# Altium PCB Item.PcbDoc
Units mm, origin at the board's own origin, x right, y up, seen from the top; angles counter-clockwise.
Board outline 55.9 x 55.9 mm, 2 copper layers (Top Layer, Bottom Layer); 35 components, 44 nets, 170 pads, 174 vias.
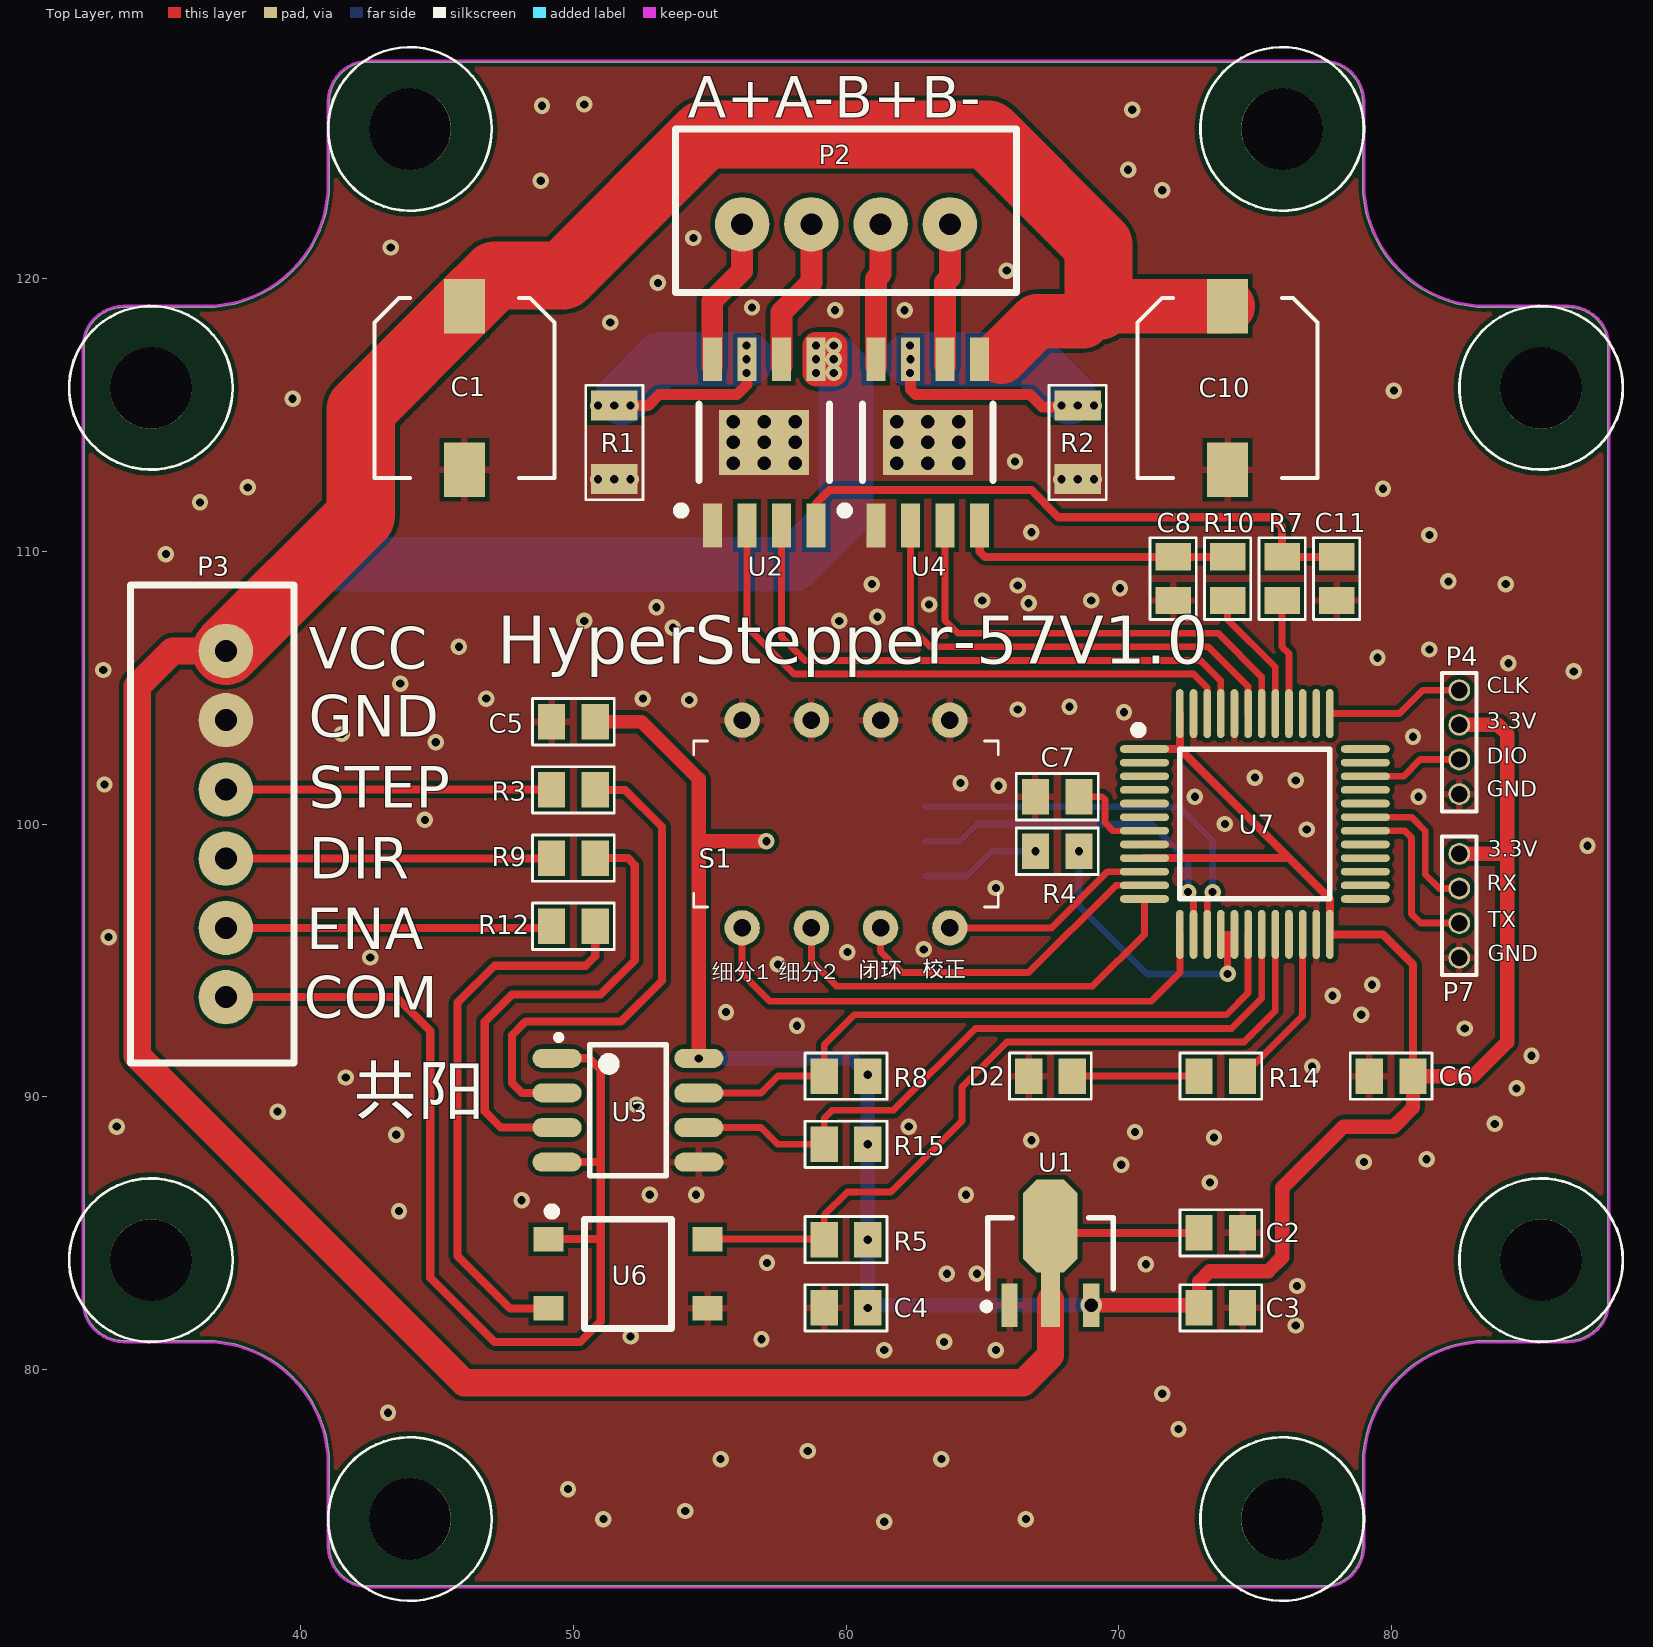
[diagram p0: Top Layer view]
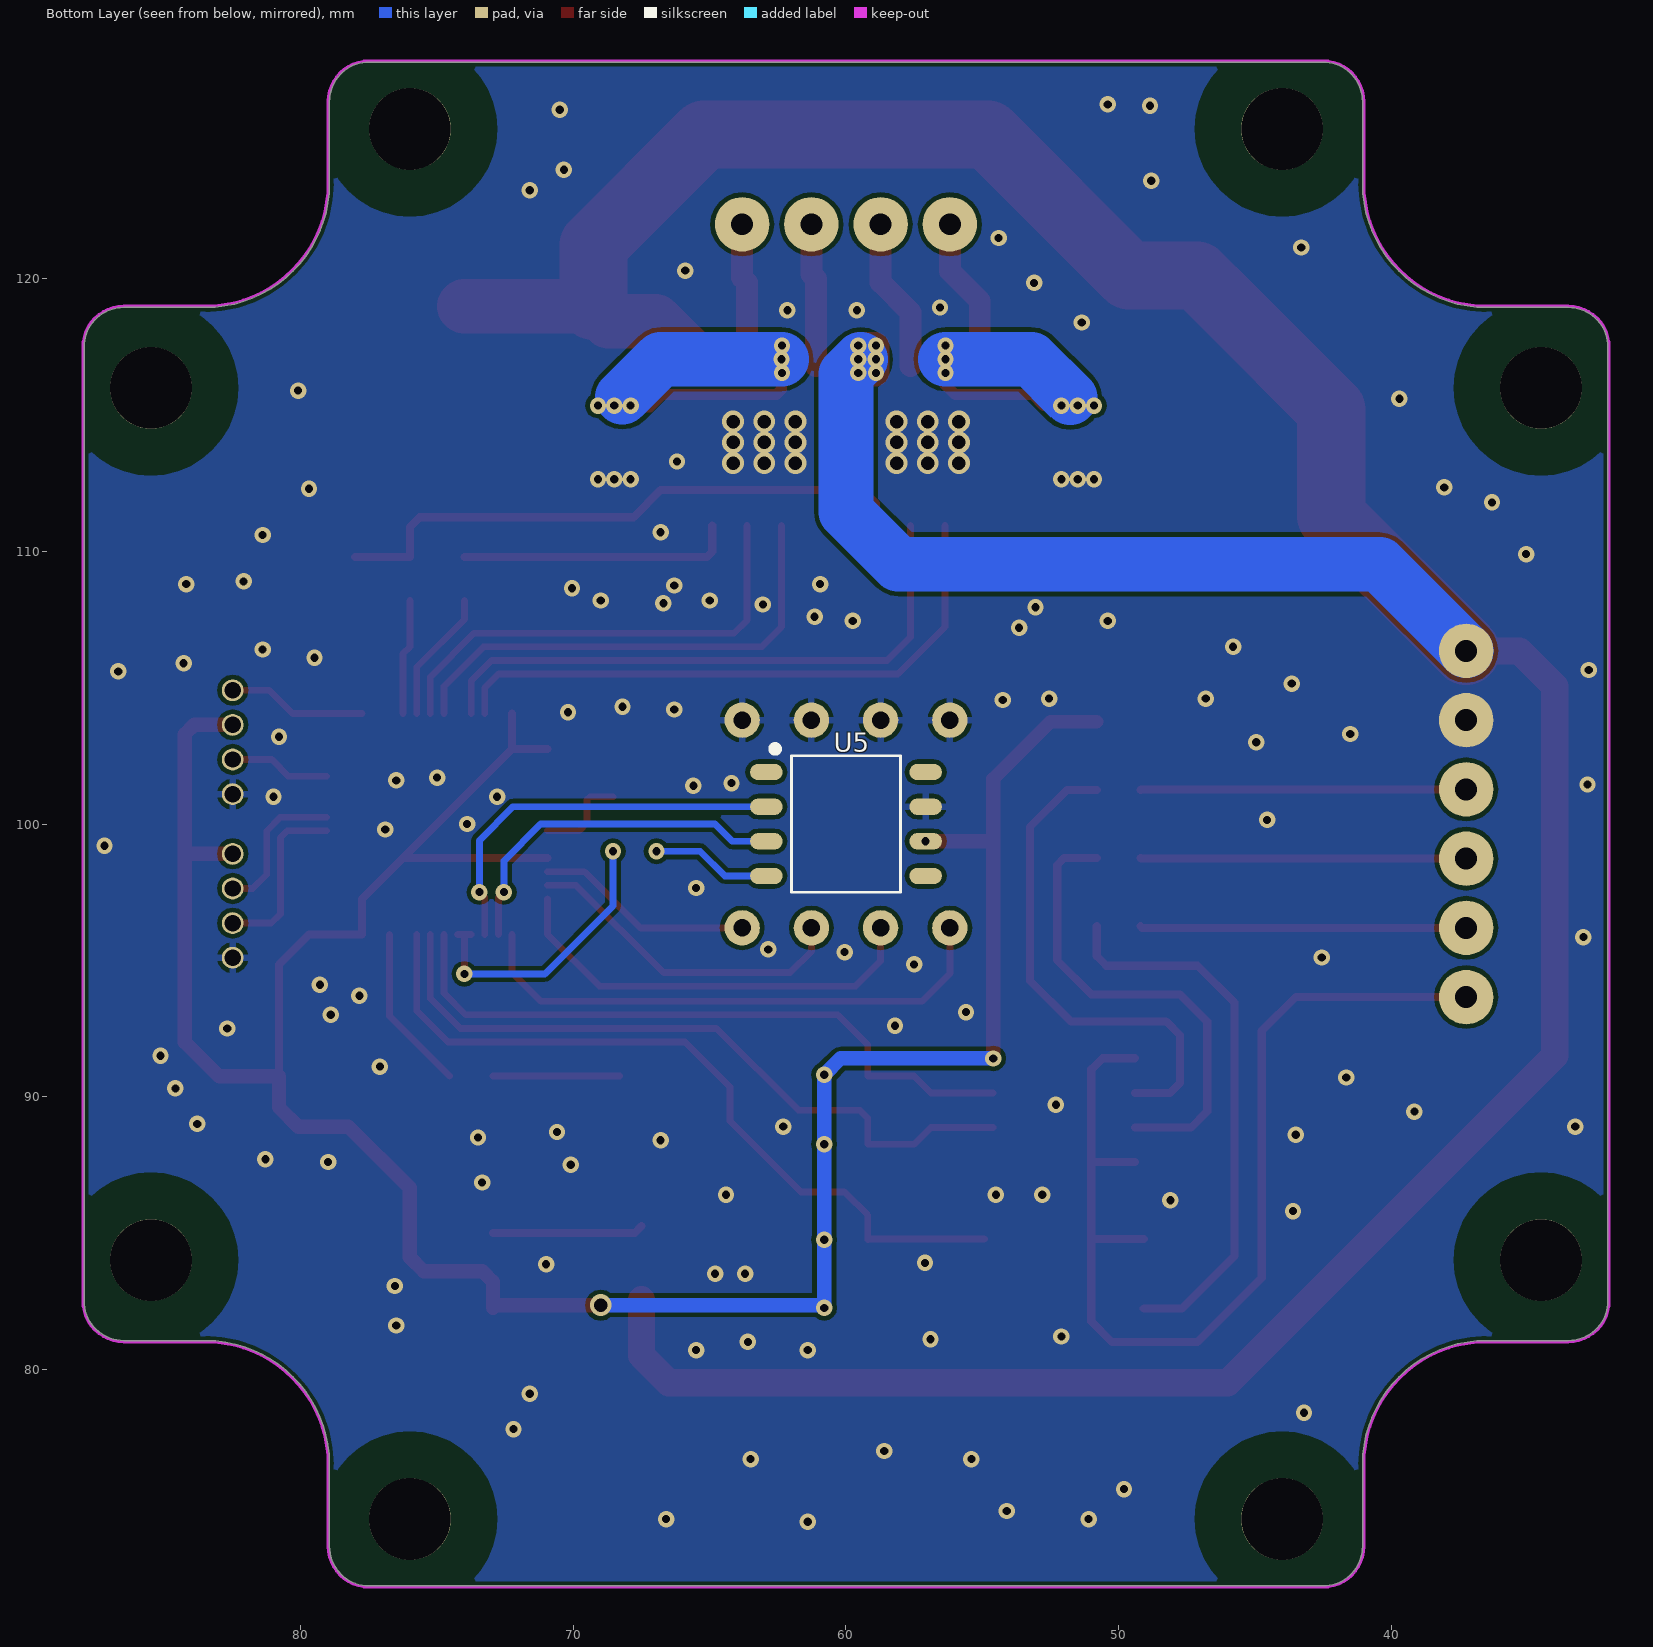
[diagram p1: Bottom Layer view, seen from below]

## Layer stack, top to bottom
Top Layer: signal copper 0.0356
Dielectric: dielectric 0.32, FR-4, Dk 4.8
Bottom Layer: signal copper 0.0356

## Board outline
41.05,73.5 41.05,76.5 cw(c41,76.5) 41.05,76.499 41.05,76.5 ccw(c36.5,76.5) 36.5,81.05 33.5,81.05 cw(c33.5,82.5) 32.05,82.5 32.05,117.5 cw(c33.5,117.5) 33.5,118.95 36.5,118.95 ccw(c36.5,123.5) 41.05,123.5 ccw(c41,123.5) 41.05,123.501 41.05,126.5 cw(c42.5,126.5) 42.5,127.95 77.5,127.95 cw(c77.5,126.5) 78.95,126.5 78.95,123.5 ccw(c83.5,123.5) 83.5,118.95 ccw(c83.5,119) 83.501,118.95 86.5,118.95 cw(c86.5,117.5) 87.95,117.5 87.95,82.5 cw(c86.5,82.5) 86.5,81.05 83.476,81.05 ccw(c83.476,81) 83.473,81.05 ccw(c83.5,76.5) 78.95,76.527 ccw(c79,76.524) 78.95,76.524 78.95,73.5 cw(c77.5,73.5) 77.5,72.05 42.5,72.05 cw(c42.5,73.5)

## Design rules (kind name [scope] priority, off if disabled: settings)
Clearance [All] p1: gap=0.16
ComponentClearance [All] p1: gap=0 collisioncheckmode=3 verticalgap=0 showdistances=FALSE
HoleSize [All] p1: absolutevalues=TRUE maxlimit=5 minlimit=0.3 maxpercent=80.000 minpercent=20.000
HoleToHoleClearance [All] p1: gap=0.16 allowstackedmicrovias=TRUE
MinimumSolderMaskSliver [All] p1: minsoldermaskwidth=0
PolygonConnect PolygonConnect_3 [(InComponent('U2') OR InComponent('U4') OR InComponent('R2') OR InComponent('R1'))] p1: connectstyle=Direct reliefconductorwidth=0.254 reliefentries=4 polygonreliefangle="90 Angle"
PolygonConnect PolygonConnect_2 [InComponent('P3')] p2: connectstyle=Direct reliefconductorwidth=0.254 reliefentries=4 polygonreliefangle="90 Angle"
PolygonConnect PolygonConnect_1 [isvia] p3: connectstyle=Direct reliefconductorwidth=0.254 reliefentries=4 polygonreliefangle="90 Angle"
PolygonConnect [All] p4: connectstyle=Relief reliefconductorwidth=0.254 reliefentries=4 polygonreliefangle="90 Angle"
RoutingVias [All] p1: holewidth=0.3 width=0.6 viastyle="Through Hole" minholewidth=0.3 minwidth=0.5 maxholewidth=0.711 maxwidth=1.27
SilkToSilkClearance [All] p1: silktosilkclearance=0
SilkscreenOverComponentPads [All] p1: minsilkscreentomaskgap=0.1
SolderMaskExpansion [All] p1: expansion=0.102
Width [All] p1: maxlimit=5 minlimit=0.16 preferedwidth=0.25
22 further rules are at their usual default settings.

## Components (designator, comment, footprint, x,y, rotation, side; value= is the part's Value field where it differs from the comment)
C1 "CAP POL" CAP6377 46,116 r0 top
C2 "CAP" 0805 73.75,85 r0 top
C3 "CAP" 0805 73.75,82.25 r0 top
C4 "CAP" 0805 60,82.25 r180 top
C5 "CAP" 0805 50,103.75 r180 top
C6 "CAP" 0805 80,90.75 r180 top
C7 "CAP" 0805 67.75,101 r0 top
C8 "CAP" 0805 72,109 r270 top
C10 "CAP POL" CAP6377 74,116 r0 top
C11 "CAP" 0805 78,109 r270 top
D2 "LED" 0805 67.5,90.75 r180 top
P2 "HEADER4" XH-4 60,122 r180 top
P3 "HEADER6" XH-6 37.25,100 r270 top
P4 "HEADER4" 4P-1.27MM 82.5,103 r270 top
P7 "HEADER4" 4P-1.27MM 82.5,97 r270 top
R1 "RES" 1206 51.5,114 r90 top
R2 "RES" 1206 68.5,114 r90 top
R3 "RES" 0805 50,101.25 r0 top
R4 "RES" 0805 67.75,99 r0 top
R5 "RES" 0805 60,84.75 r0 top
R7 "RES" 0805 76,109 r270 top
R8 "RES" 0805 60,90.75 r0 top
R9 "RES" 0805 50,98.75 r0 top
R10 "RES" 0805 74,109 r90 top
R12 "RES" 0805 50,96.25 r0 top
R14 "RES" 0805 73.75,90.75 r0 top
R15 "RES" 0805 60,88.25 r180 top
S1 "SWDIP-4" SWDIP-4 60,100 r90 top
U1 "HT7333" SOT89 67.5,84.25 r0 top
U2 "A4950" SOIC-8_A4950 57,114 r0 top
U3 "TLP2168" SO-8_3.9MM 52,89.5 r270 top
U4 "A4950" SOIC-8_A4950 63,114 r0 top
U5 "TLE5012B" PG-DSO-8F 60,100 r180 bottom
U6 "EL817" SOP-4_P2.54 52,83.5 r0 top
U7 "STM32F030C8" LQFP-48_7x7x05P 75,100 r270 top

## Footprints (in the part's own frame and the unit in brackets; to place one, negate y for a bottom-side part, rotate by r counter-clockwise, add the part's x,y. Pads: shape width x height; smd on the part's side, far side on the other; paste and mask are expansions set on the pad)
4P-1.27MM [mm]
  round 0.8 hole 0.6: 1(-1.905,0) 2(-0.635,0) 3(0.635,0) 4(1.905,0)
  silkscreen extent -2.54,-0.64 2.54,0.64
0805 [mm] "Chip Resistor, Body 2.0x1.2mm, IPC High Density"
  rect 1x1.3 smd: 1(-0.8,0) 2(0.8,0)
  silkscreen extent -1.5,-0.85 1.5,0.85
1206 [mm] "Chip Capacitor, Body 3.2x1.6mm, IPC High Density"
  rect 1.1x1.7 smd: 1(-1.35,0) 2(1.35,0)
  silkscreen extent -2.1,-1.05 2.1,1.05
CAP6377 [mm]
  rect 1.5x2 smd: 1(0,3) 2(0,-3)
  silkscreen extent -3.3,-3.3 3.3,3.3
LQFP-48_7x7x05P [mm]
  oval 0.28x1.8 smd mask+0.051: 1(-2.75,-4.05) 2(-2.25,-4.05) 3(-1.75,-4.05) 4(-1.25,-4.05) 5(-0.75,-4.05) 6(-0.25,-4.05) 7(0.25,-4.05) 8(0.75,-4.05) 9(1.25,-4.05) 10(1.75,-4.05) 11(2.25,-4.05) 12(2.75,-4.05) 25(2.75,4.05) 26(2.25,4.05) 27(1.75,4.05) 28(1.25,4.05) 29(0.75,4.05) 30(0.25,4.05) 31(-0.25,4.05) 32(-0.75,4.05) 33(-1.25,4.05) 34(-1.75,4.05) 35(-2.25,4.05) 36(-2.75,4.05)
  oval 1.8x0.28 smd mask+0.051: 13(4.05,-2.75) 14(4.05,-2.25) 15(4.05,-1.75) 16(4.05,-1.25) 17(4.05,-0.75) 18(4.05,-0.25) 19(4.05,0.25) 20(4.05,0.75) 21(4.05,1.25) 22(4.05,1.75) 23(4.05,2.25) 24(4.05,2.75) 37(-4.05,2.75) 38(-4.05,2.25) 39(-4.05,1.75) 40(-4.05,1.25) 41(-4.05,0.75) 42(-4.05,0.25) 43(-4.05,-0.25) 44(-4.05,-0.75) 45(-4.05,-1.25) 46(-4.05,-1.75) 47(-4.05,-2.25) 48(-4.05,-2.75)
  silkscreen extent -3.6,-4.42 2.75,2.75
PG-DSO-8F [mm] "SOP, 8-Leads, Body 4.9x3.9mm, Pitch 1.27mm, IPC Medium Density"
  oval 1.2x0.6 smd: 1(-2.921,1.905) 2(-2.921,0.635) 3(-2.921,-0.635) 4(-2.921,-1.905) 5(2.921,-1.905) 6(2.921,-0.635) 7(2.921,0.635) 8(2.921,1.905)
  silkscreen extent -2.73,-2.5 2,2.88
SO-8_3.9MM [mm]
  oval 0.7x1.8 smd: 1(-1.905,-2.6) 2(-0.635,-2.6) 3(0.635,-2.6) 4(1.905,-2.6) 5(1.905,2.6) 6(0.635,2.6) 7(-0.635,2.6) 8(-1.905,2.6)
  silkscreen extent -2.75,-2.62 2.4,1.4
SOIC-8_A4950 [mm]
  rect 0.7x1.6 smd: 1(-1.905,-3.048) 2(-0.635,-3.048) 3(0.635,-3.048) 4(1.905,-3.048) 5(1.905,3.048) 6(0.635,3.048) 7(-0.635,3.048) 8(-1.905,3.048)
  rect 3.3x2.4 smd: 9(0,-0.005)
  silkscreen extent -3.2,-2.65 2.4,1.4
SOP-4_P2.54 [mm]
  rect 1.1x0.9 smd: 1(-2.921,1.27) 2(-2.921,-1.27) 3(2.921,-1.27) 4(2.921,1.27)
  silkscreen extent -2.94,-2 1.6,2.44
SOT89 [mm] "SOT89, 3-Leads, Body 4.5x2.4 mm, Pitch 1.5mm, Lead Span 4.1mm, IPC Low Density"
  rect 0.6x1.6 smd: 1(-1.5,-1.9) 3(1.5,-1.9)
  rect 0.7x2 smd: 2(0,-1.7)
  oct 2x3.4 smd: 2(0,1)
  silkscreen extent -2.47,-2.07 2.3,1.3
SWDIP-4 [mm]
  round 1.3 hole 0.65: 1(-3.81,3.81) 2(3.81,3.81) 3(-3.81,1.27) 4(3.81,1.27) 5(-3.81,-1.27) 6(3.81,-1.27) 7(-3.81,-3.81) 8(3.81,-3.81)
  silkscreen extent -3.05,-5.59 3.05,5.59
XH-4 [mm]
  round 2 hole 0.8: 1(-3.81,0) 2(-1.27,0) 3(1.27,0) 4(3.81,0)
  silkscreen extent -6.25,-3.5 6.25,2.5
XH-6 [mm]
  round 2 hole 0.8: 1(-6.35,0) 2(-3.81,0) 3(-1.27,0) 4(1.27,0) 5(3.81,0) 6(6.35,0)
  silkscreen extent -8.76,-3.5 8.76,2.5

## Part data
C1 C10: "Polarized Capacitor (Axial)"
C2 C3 C4 C5 C6 C7 C8 C11: "Capacitor"
D2: "Typical INFRARED GaAs LED"
P2 P4 P7: "Header, 4-Pin"
P3: "Header, 6-Pin"
R1 R2 R3 R4 R5 R7 R8 R9 R10 R12 R14 R15: "Resistor"
S1: "DIP Switch, 4Position, SPST"
U1: "Positive Voltage Regulator"
U2 U4: "Dual Full-Bridge  DMOS PWM Motor Driver"
U3: "HIGH SPEED 10MBit/s LOGIC GATE  PHOTOCOUPLER"
U5: "GMR-Based Angle Sensor"
U6: "4 PIN PHOTOTRANSISTOR"
U7: "ST Microcontroller"

## Free pads (board coordinates)
  round 3 hole 3: ""(34.5,84) ""(34.5,116) ""(44,74.5) ""(44,125.5) ""(76,74.5) ""(76,125.5) ""(85.5,84) ""(85.5,116)

## Via types
v1: diameter 0.6, hole 0.3, Top Layer to Bottom Layer, 155 vias
v2: diameter 0.8, hole 0.5, Top Layer to Bottom Layer, 19 vias

## Nets (pads, with @x,y where several pads share a name; then routed paths per layer and width w, separated by ;. In a path a pad name is that pad's centre, name@x,y a point inside that pad or via, vN(x,y) a via of type N, cw(c..) or ccw(c..) an arc to the next point about the centre after c; other vN are vias at no path point)
3.3V: C3.1 C4.1 C5.1 C6.1 P4.2 P7.1 R5.2 R8.2 R15.1 U1.3 U3.8 U5.6 U7.1 U7.9 U7.24 U7.48 | length 102.2
  Top Layer w0.3: U7.9 76.25,98.75 ; U7.1 72.25,102.75 ; U7.48 72.25,102.75 ; C6.1 80.8,94.85 79.7,95.95 U7.24 77.75,97.25 76.25,98.75 ; 72.25,102.75 76.25,98.75
  Top Layer w0.5: C5.1 52.5,103.75 54.6,101.65
  Top Layer w0.53: U3.8 54.6,101.65 ; 54.6,99.365 v1(57.079,99.365) ; v2(69,82.35) 72.85,82.35 C3.1 72.95,83.2 73.35,83.6 75.5,83.6 76,84.1 76,86.65 78.25,88.9 80.1,88.9 80.8,89.6 C6.1 83,90.75 84.25,92 84.25,98.95 ; P7.1 84.205,98.905 84.25,98.95 ; P4.2 83.915,103.635 84.25,103.3 84.25,98.95
  Bottom Layer w0.53: v1(54.6,91.4) 60.2,91.4 v1(60.8,90.8) v1(60.8,82.25) 60.9,82.35 v2(69,82.35)
  other v1: 60.8,84.75 60.8,88.25
CAL: S1.7 U7.10 | length 8
  Top Layer w0.25: S1.7 67.54,96.19 69.6,98.25 U7.10
CLK-: P3.3 R3.1 | length 12
  Top Layer w0.3: P3.3 49.18,101.27 R3.1
CLKIN: R8.1 U3.7 U7.18 | length 24.5
  Top Layer w0.25: U3.7 56.885,90.135 57.5,90.75 R8.1 59.2,91.9 60.3,93 73.95,93 74.75,93.8 U7.18
COM: P3.6 U3.1 U3.4 U6.1 | length 39.1
  Top Layer w0.3: P3.6 43.5,93.65 44.75,92.4 44.75,83.35 47.1,81 50.25,81 51,81.75 51,84.77 ; U6.1 51,84.77 ; U3.4 51,87.595 ; U3.1 50.595,91.405 51,91 51,87.595 ; 51,84.77 51,87.595
CSQ: U5.3 U7.14 | length 13.2
  Top Layer w0.25: v1(72.55,97.5) 72.75,97.3 U7.14
  Bottom Layer w0.25: U5.3 64.165,99.365 64.8,100 71.2,100 72.55,98.65 v1(72.55,97.5)
DATA: R4.1 U5.4 | length 4.4
  Bottom Layer w0.25: U5.4 64.445,98.095 65.35,99 v1(66.95,99)
DIR-: P3.4 R9.1 | length 12
  Top Layer w0.3: P3.4 49.18,98.73 R9.1
DIRIN: R15.2 U3.6 U7.19 | length 26
  Top Layer w0.25: U3.6 56.885,88.865 57.5,88.25 R15.2 59.2,89.2 59.5,89.5 61.75,89.5 64.75,92.5 74.15,92.5 75.25,93.6 U7.19
EN-: P3.5 R12.1 | length 12
  Top Layer w0.3: P3.5 49.14,96.19 R12.1
ENIN: R5.1 U6.4 U7.20 | length 28.4
  Top Layer w0.25: U6.4 59.18,84.77 R5.1 59.2,85.65 60.05,86.5 61.65,86.5 64.25,89.1 64.25,90.35 65.9,92 74.6,92 75.75,93.15 U7.20
GND: C1.2 C2.2 C3.2 C4.2 C5.2 C6.2 C7.1 C8.2 C10.2 C11.2 D2.2 P3.2 P4.4 P7.4 R1.1 R2.1 S1.2 S1.4 S1.6 S1.8 U1.1 U2.1 U2.9 U3.5 U4.1 U4.9 U5.7 U6.3 U7.8 U7.23 U7.44 U7.47
  other v1: 61.4,74.4 51.1,74.5 66.6,74.5 54.1,74.8 49.8,75.6 55.4,76.7 63.5,76.7 58.6,77 72.2,77.8 43.2,78.4 71.6,79.1 61.4,80.7 65.5,80.7 63.6,81 56.9,81.1 52.1,81.2 76.5,81.6 76.55,83.05 63.7,83.5 64.8,83.5 71,83.85 57.1,83.9 43.6,85.8 48.1,86.2 52.8,86.4 54.5,86.4 64.4,86.4 73.35,86.85 70.1,87.5 79,87.6 81.3,87.7 66.8,88.4 73.5,88.5 43.5,88.6 70.6,88.7 33.25,88.9 62.3,88.9 83.8,89 39.15,89.45 52.3,89.7 84.6,90.3 41.65,90.7 77.1,91.1 85.15,91.5 82.7,92.5 58.2,92.6 78.9,93 55.6,93.1 77.85,93.7 79.3,94.1 57.5,94.85 42.55,95.1 60.05,95.3 62.85,95.4 32.95,95.85 65.5,97.65 87.2,99.2 76.9,99.8 73.9,100 44.55,100.15 72.8,101 81,101 65.6,101.4 32.8,101.45 64.2,101.5 76.5,101.6 75,101.7 44.95,103 80.8,103.2 41.5,103.3 70.2,104.1 66.3,104.2 68.2,104.3 54.25,104.55 46.8,104.6 52.55,104.6 43.65,105.15 86.7,105.6 32.75,105.65 84.3,105.9 79.5,106.1 81.4,106.4 45.8,106.5 53.65,107.2 50.4,107.45 59.75,107.45 61.15,107.6 53.05,107.95 63.05,108.05 66.7,108.1 65,108.2 69,108.2 70.05,108.65 66.3,108.75 60.95,108.8 84.2,108.8 82.1,108.9 35.05,109.9 81.4,110.6 66.8,110.7 36.3,111.8 79.7,112.3 38.05,112.35 50.9,112.65 51.5,112.65 52.1,112.65 67.9,112.65 68.5,112.65 69.1,112.65 66.2,113.3 39.7,115.6 80.1,115.9 51.35,118.4 59.6,118.85 62.15,118.85 56.55,118.95 53.1,119.85 65.9,120.3 43.3,121.15 54.4,121.5 71.6,123.25 48.8,123.6 70.35,124 70.5,126.2 48.85,126.35 50.4,126.4
  other v2: 55.857,113.238 57,113.238 58.143,113.238 61.857,113.238 63,113.238 64.143,113.238 55.857,114 57,114 58.143,114 61.857,114 63,114 64.143,114 55.857,114.762 57,114.762 58.143,114.762 61.857,114.762 63,114.762 64.143,114.762
IN1: U4.3 U7.42 | length 17.3
  Top Layer w0.25: U4.3 63.635,107.465 64.1,107 73.65,107 75.25,105.4 U7.42
IN2: U4.2 U7.43 | length 18
  Top Layer w0.25: U4.2 62.365,107.235 63.1,106.5 73.3,106.5 74.75,105.05 U7.43
IN3: U2.3 U7.45 | length 22.1
  Top Layer w0.25: U2.3 57.635,106.865 58.5,106 73,106 73.75,105.25 U7.45
IN4: U2.2 U7.46 | length 22.5
  Top Layer w0.25: U2.2 56.365,107.235 58.1,105.5 72.75,105.5 73.25,105 U7.46
MGH-: U7.2
MGL-: U7.3
NetC7_2: C7.2 U7.7 | length 3.4
  Top Layer w0.25: C7.2 69.4,101 69.5,100.9 69.5,100.05 69.8,99.75 U7.7
NetD2_1: D2.1 R14.1 | length 4.7
  Top Layer w0.25: D2.1 R14.1
NetR1_2: R1.2 U2.7 | length 11.3
  Top Layer w0.4: v1(51.5,115.35) 52.75,115.35 53.15,115.75 56,115.75 56.365,116.115 U2.7
  Bottom Layer w2: 51.78,115.63 53.2,117.05 v1(56.35,117.05)
  other v1: 50.9,115.35 52.1,115.35 56.35,116.55 56.35,117.55
NetR2_2: R2.2 U4.7 | length 13.9
  Top Layer w0.4: v1(62.365,117.048) 62.365,115.935 62.55,115.75 66.75,115.75 67.2,115.3 68.45,115.3 v1(68.5,115.35)
  Bottom Layer w2: v1(62.365,117.048) 66.802,117.048 68.2,115.65
  other v1: 67.9,115.35 69.1,115.35 62.35,116.55 62.35,117.55
NetR3_2: R3.2 U3.2 | length 18.5
  Top Layer w0.3: U3.2 48.115,90.135 47.75,90.5 47.75,92.25 48.25,92.75 51.75,92.75 53.25,94.25 53.25,99.9 51.9,101.25 R3.2
NetR4_2: R4.2 U7.16 U7.17 | length 10.4
  Top Layer w0.25: U7.16 74,95.95 ; v1(74,94.5) 74,95.95 ; U7.17 74,95.95
  Bottom Layer w0.25: v1(68.55,99) 68.55,97 71.05,94.5 v1(74,94.5)
NetR9_2: R9.2 U3.3 | length 17.7
  Top Layer w0.3: U3.3 47.335,88.865 46.75,89.45 46.75,92.75 47.75,93.75 51,93.75 52.25,95 52.25,98.5 52,98.75 R9.2
NetR12_2: R12.2 U6.2 | length 20.3
  Top Layer w0.3: U6.2 47.67,82.23 45.75,84.15 45.75,93.45 47.1,94.8 50.45,94.8 50.8,95.15 R12.2
NetR14_2: R14.2 U7.22 | length 6.1
  Top Layer w0.25: R14.2 76.75,92.95 U7.22
OPCL: S1.5 U7.11 | length 12.2
  Top Layer w0.25: S1.5 61.27,95.33 62.05,94.55 66.7,94.55 69.9,97.75 U7.11
OUT1: P2.1 U4.6 | length 5.3
  Top Layer w0.8: U4.6@63.635,116.794 U4.6 63.635,119.865 63.81,120.04 P2.1
OUT2: P2.2 U4.8 | length 5.3
  Top Layer w0.8: U4.8@61.095,116.794 U4.8 61.095,119.995 61.27,120.17 P2.2
OUT3: P2.3 U2.6 | length 5.7
  Top Layer w0.8: U2.6@57.635,116.794 57.635,118.775 58.73,119.87 P2.3
OUT4: P2.4 U2.8 | length 5.7
  Top Layer w0.8: U2.8@55.095,116.794 U2.8 55.095,119.195 56.19,120.29 P2.4
PWM1: R7.2 U7.40 | length 4.3
  Top Layer w0.25: R7.2 76,106.5 76.25,106.25 U7.40
PWM2: R10.1 U7.41 | length 4.9
  Top Layer w0.25: R10.1 74,107.5 75.75,105.75 U7.41
RX: P7.2 U7.31 | length 5.5
  Top Layer w0.25: U7.31 80.75,100.25 81.25,99.75 81.25,98.15 81.765,97.635 P7.2
SCK: U5.2 U7.15 | length 14.6
  Top Layer w0.25: U7.15 73.25,97.3 v1(73.45,97.5)
  Bottom Layer w0.25: U5.2 72.215,100.635 73.45,99.4 v1(73.45,97.5)
SET1: S1.1 U7.13 | length 20
  Top Layer w0.25: S1.1 56.19,94.51 57.2,93.5 71.2,93.5 72.25,94.55 U7.13
SET2: S1.3 U7.12 | length 15.9
  Top Layer w0.25: S1.3 58.73,94.97 59.65,94.05 69.05,94.05 70.95,95.95 U7.12
SWCLK: P4.1 U7.37 | length 5.1
  Top Layer w0.25: U7.37 80.3,104.05 81.155,104.905 P4.1
SWDIO: P4.3 U7.34 | length 3.7
  Top Layer w0.25: U7.34 80.45,101.75 81.065,102.365 P4.3
TX: P7.3 U7.30 | length 6.5
  Top Layer w0.25: U7.30 80.5,99.75 80.75,99.5 80.75,96.7 81.085,96.365 P7.3
VIN: C1.1 C2.1 C10.1 P3.1 U1.2 U2.5 U4.5 | length 152.9
  Top Layer w0.3: U1.2@67.5,85.25 67.75,85 C2.1
  Top Layer w1: P3.1 35.3,106.35 34,105.05 34,91.5 46,79.5 66.5,79.5 67.5,80.5 U1.2@67.5,82.55 ; U2.5@58.9,117.053 v1(58.9,117.55) v1(59.55,117.55) v1(59.55,117.05) v1(59.55,116.55) 58.91,116.55 58.905,116.555 v1(58.905,117.048) U2.5@58.9,117.053
  Top Layer w2: 65.7,117.15 67,118.45 68.707,118.45 69.257,119 C10.1
  Top Layer w2.5: P3.1 42.2,111.3 42.2,115.2 C1.1 47.121,120.121 49.621,120.121 54.8,125.3 65.2,125.3 69.257,121.243 69.257,119
  Bottom Layer w2: P3.1 40.425,109.525 58.075,109.525 60,111.45 60,116.5 v1@59.452,117.048
  other v1: 58.9,116.55
VR12: C8.1 R10.2 U4.4 | length 10.1
  Top Layer w0.3: U4.4 64.905,109.995 65.1,109.8 C8.1 R10.2
VR34: C11.1 R7.1 U2.4 | length 21.8
  Top Layer w0.3: U2.4 58.905,111.755 59.4,112.25 66.8,112.25 67.8,111.25 75.65,111.25 76,110.9 R7.1 C11.1
pads on no net: U5.1 U5.5 U5.8 U7.4 U7.5 U7.6 U7.21 U7.25 U7.26 U7.27 U7.28 U7.29 U7.32 U7.33 U7.35 U7.36 U7.38 U7.39

## Polygon pours and split planes (outlines as drawn)
GND on Bottom Layer "Top Layer-No Net" (solid, remove dead copper, pour order 4): 32,128 32,72 88,72 88,128
GND on Top Layer "Top Layer-No Net" (solid, remove dead copper, pour order 6): 32,128 32,72 88,72 88,128

## Keep-outs
Keep-Out Layer:
  lines w0.1: 77.5,128 cw(c77.5,126.5) 79,126.5 ; 77.6,128 42.5,128 ccw(c42.5,126.5) 41,126.5 41,123.5 cw(c36.5,123.5) 36.5,119 33.5,119 ccw(c33.5,117.5) 32,117.5 32,82.5 ccw(c33.5,82.5) 33.5,81 36.5,81 cw(c36.5,76.5) 41,76.5 41,73.5 ccw(c42.5,73.5) 42.5,72 77.5,72 ccw(c77.5,73.5) 79,73.5 79,76.524 ; 79,76.503 cw(c83.5,76.5) 83.5,81 ; 79,126.6 79,123.5 ccw(c83.5,123.5) 83.5,119 86.5,119 cw(c86.5,117.5) 88,117.5 88,82.5 cw(c86.5,82.5) 86.5,81 83.476,81

## Silkscreen, mask and mechanical layers (free items; w line width, h text height)
Top Overlay:
  circle w0.1: c34.5,116 r3
  circle w0.1: c44,125.5 r3
  circle w0.1: c76,125.5 r3
  circle w0.1: c85.5,116 r3
  circle w0.1: c85.5,84 r3
  circle w0.1: c76,74.5 r3
  circle w0.1: c44,74.5 r3
  circle w0.1: c34.5,84 r3
  text "A+A-B+B-" at 54.2,125.9 h1.52
  text "VCC" at 40.3,105.7 h1.52
  text "HyperStepper-57V1.0" at 47.2,105.3 h3
  text "CLK" at 83.5,104.6 h1
  text "3.3V" at 83.5,103.3 h1
  text "GND" at 40.3,103.2 h1.52
  text "DIO" at 83.5,102 h1
  text "GND" at 83.5,100.8 h1
  text "STEP" at 40.3,100.6 h1.52
  text "3.3V" at 83.55,98.605 h1
  text "DIR" at 40.3,98 h1.52
  text "RX" at 83.5,97.355 h1
  text "TX" at 83.535,96.005 h1
  text "ENA" at 40.2,95.4 h1.52
  text "GND" at 83.55,94.755 h1
  text "校正" at 62.8,94.2 h1
  text "闭环" at 60.45,94.15 h1
  text "细分1" at 55.1,94.1 h1
  text "细分2" at 57.55,94.1 h1
  text "COM" at 40.1,92.9 h1.52
  text "共阳" at 41.9,88.8 h3
Top Solder:
  lines w0.8: 55.1,117.05 55.1,119.2 56.1,120.2 56.2,120.3 56.2,121.99 56.19,122 ; 57.65,117.05 57.65,118.55 57.65,118.8 58.75,119.9 58.75,121.98 58.73,122 ; 61.1,117.1 61.1,120 61.27,120.17 61.27,122 ; 63.65,116.85 63.65,119.85 63.81,120.01 63.81,122
Bottom Solder:
  rectangle: 61.25,112.7 64.75,115.3
  rectangle: 55.25,112.7 58.75,115.3